# Altium PCB ADC_01_HYB - local.PcbDoc
Units mm, origin at the board's own origin, x right, y up, seen from the top; angles counter-clockwise.
Board outline 100 x 100 mm, 2 copper layers (Top Layer, Bottom Layer), stack 1.57 mm thick; 73 components, 104 nets, 316 pads, 39 vias.
Unrouted connection lines stored in the file: 71.
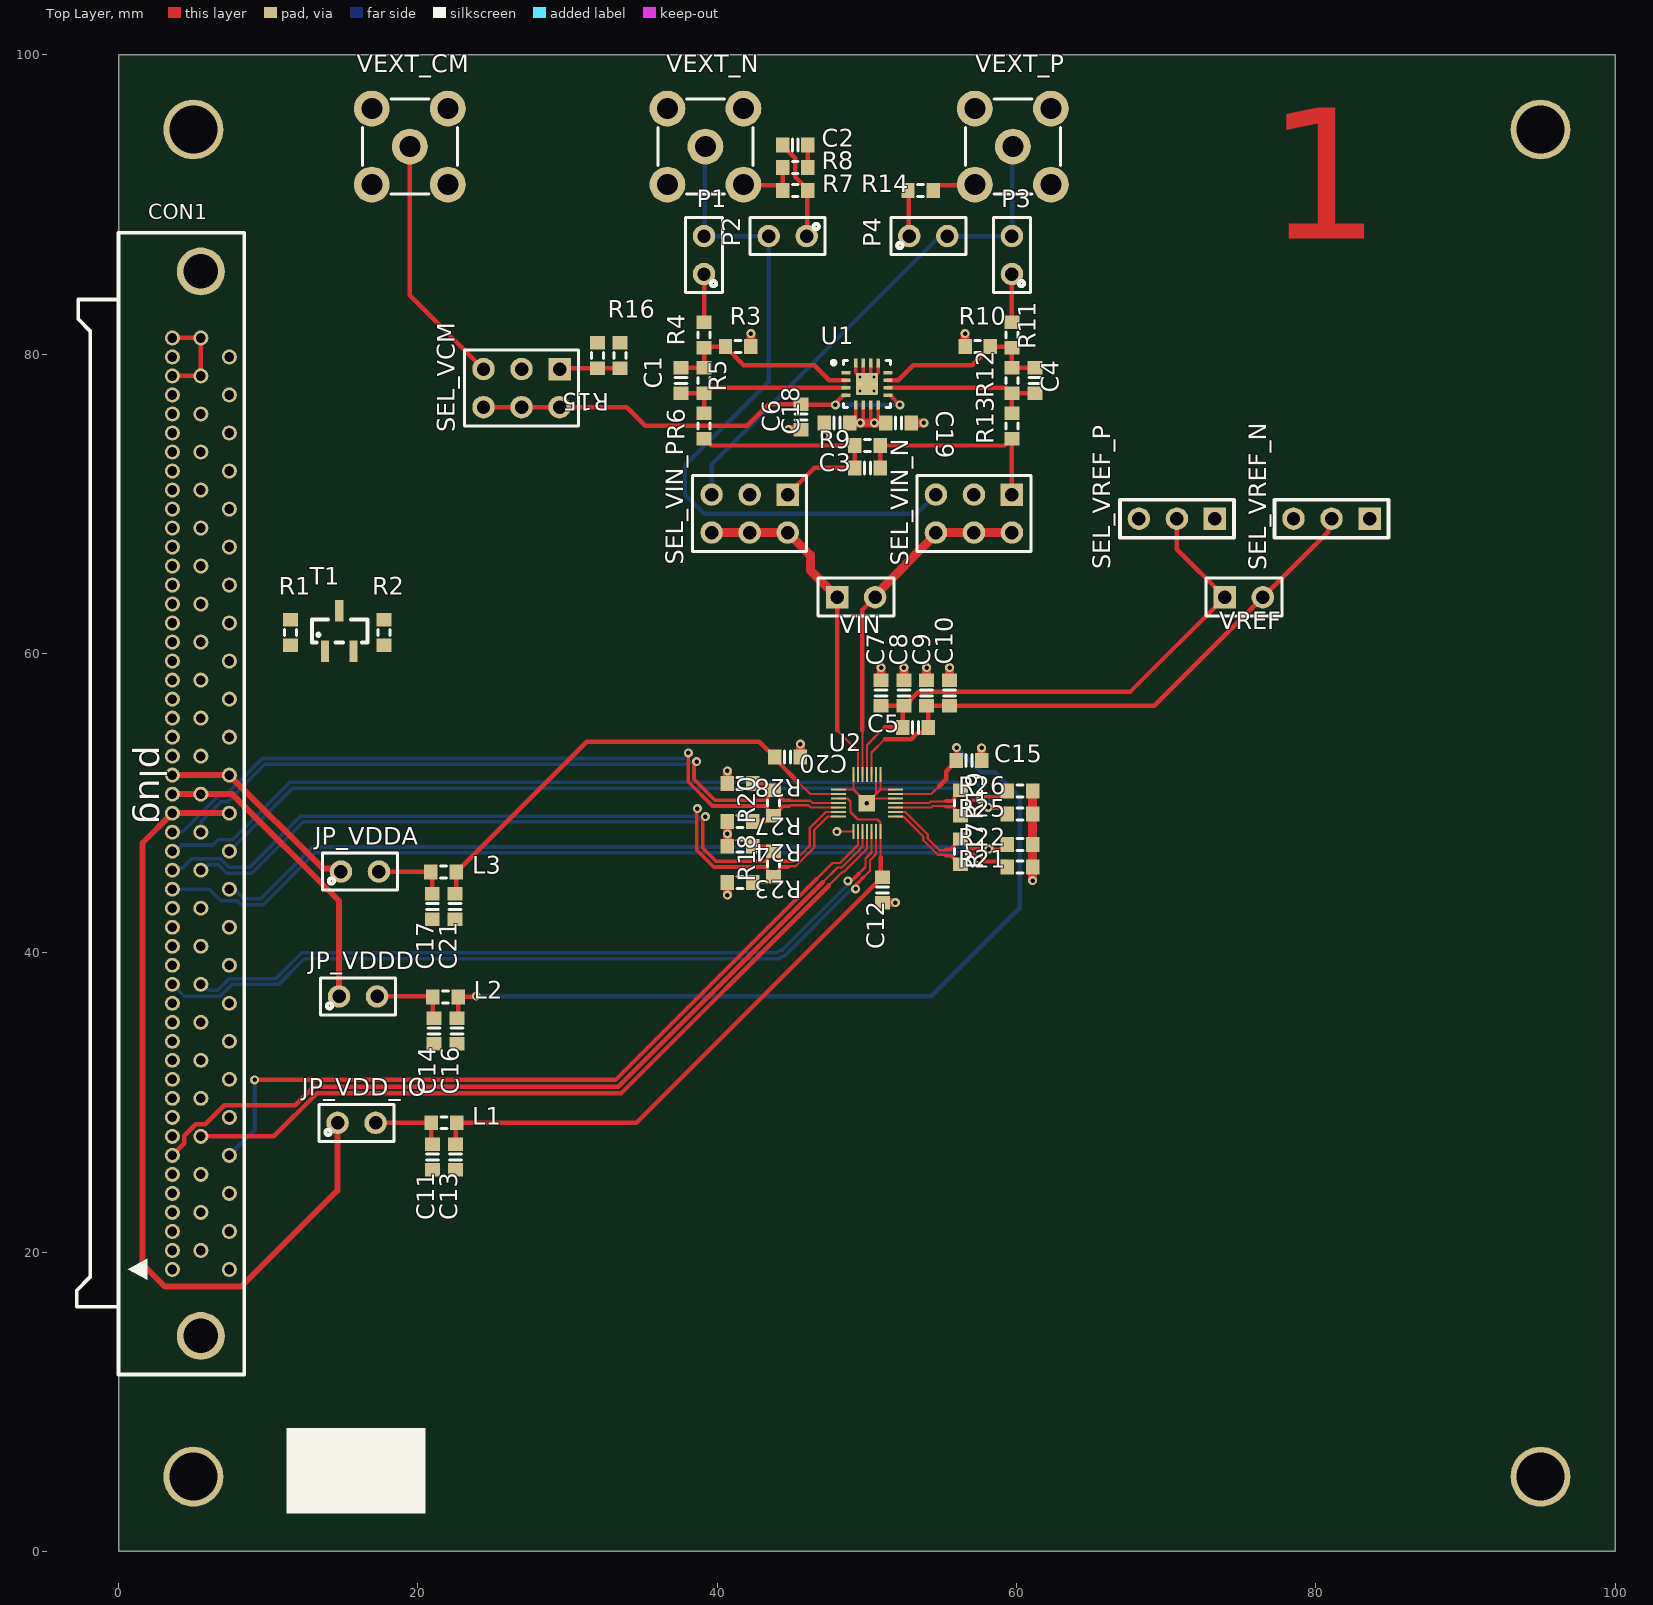
[diagram p0: Top Layer view]
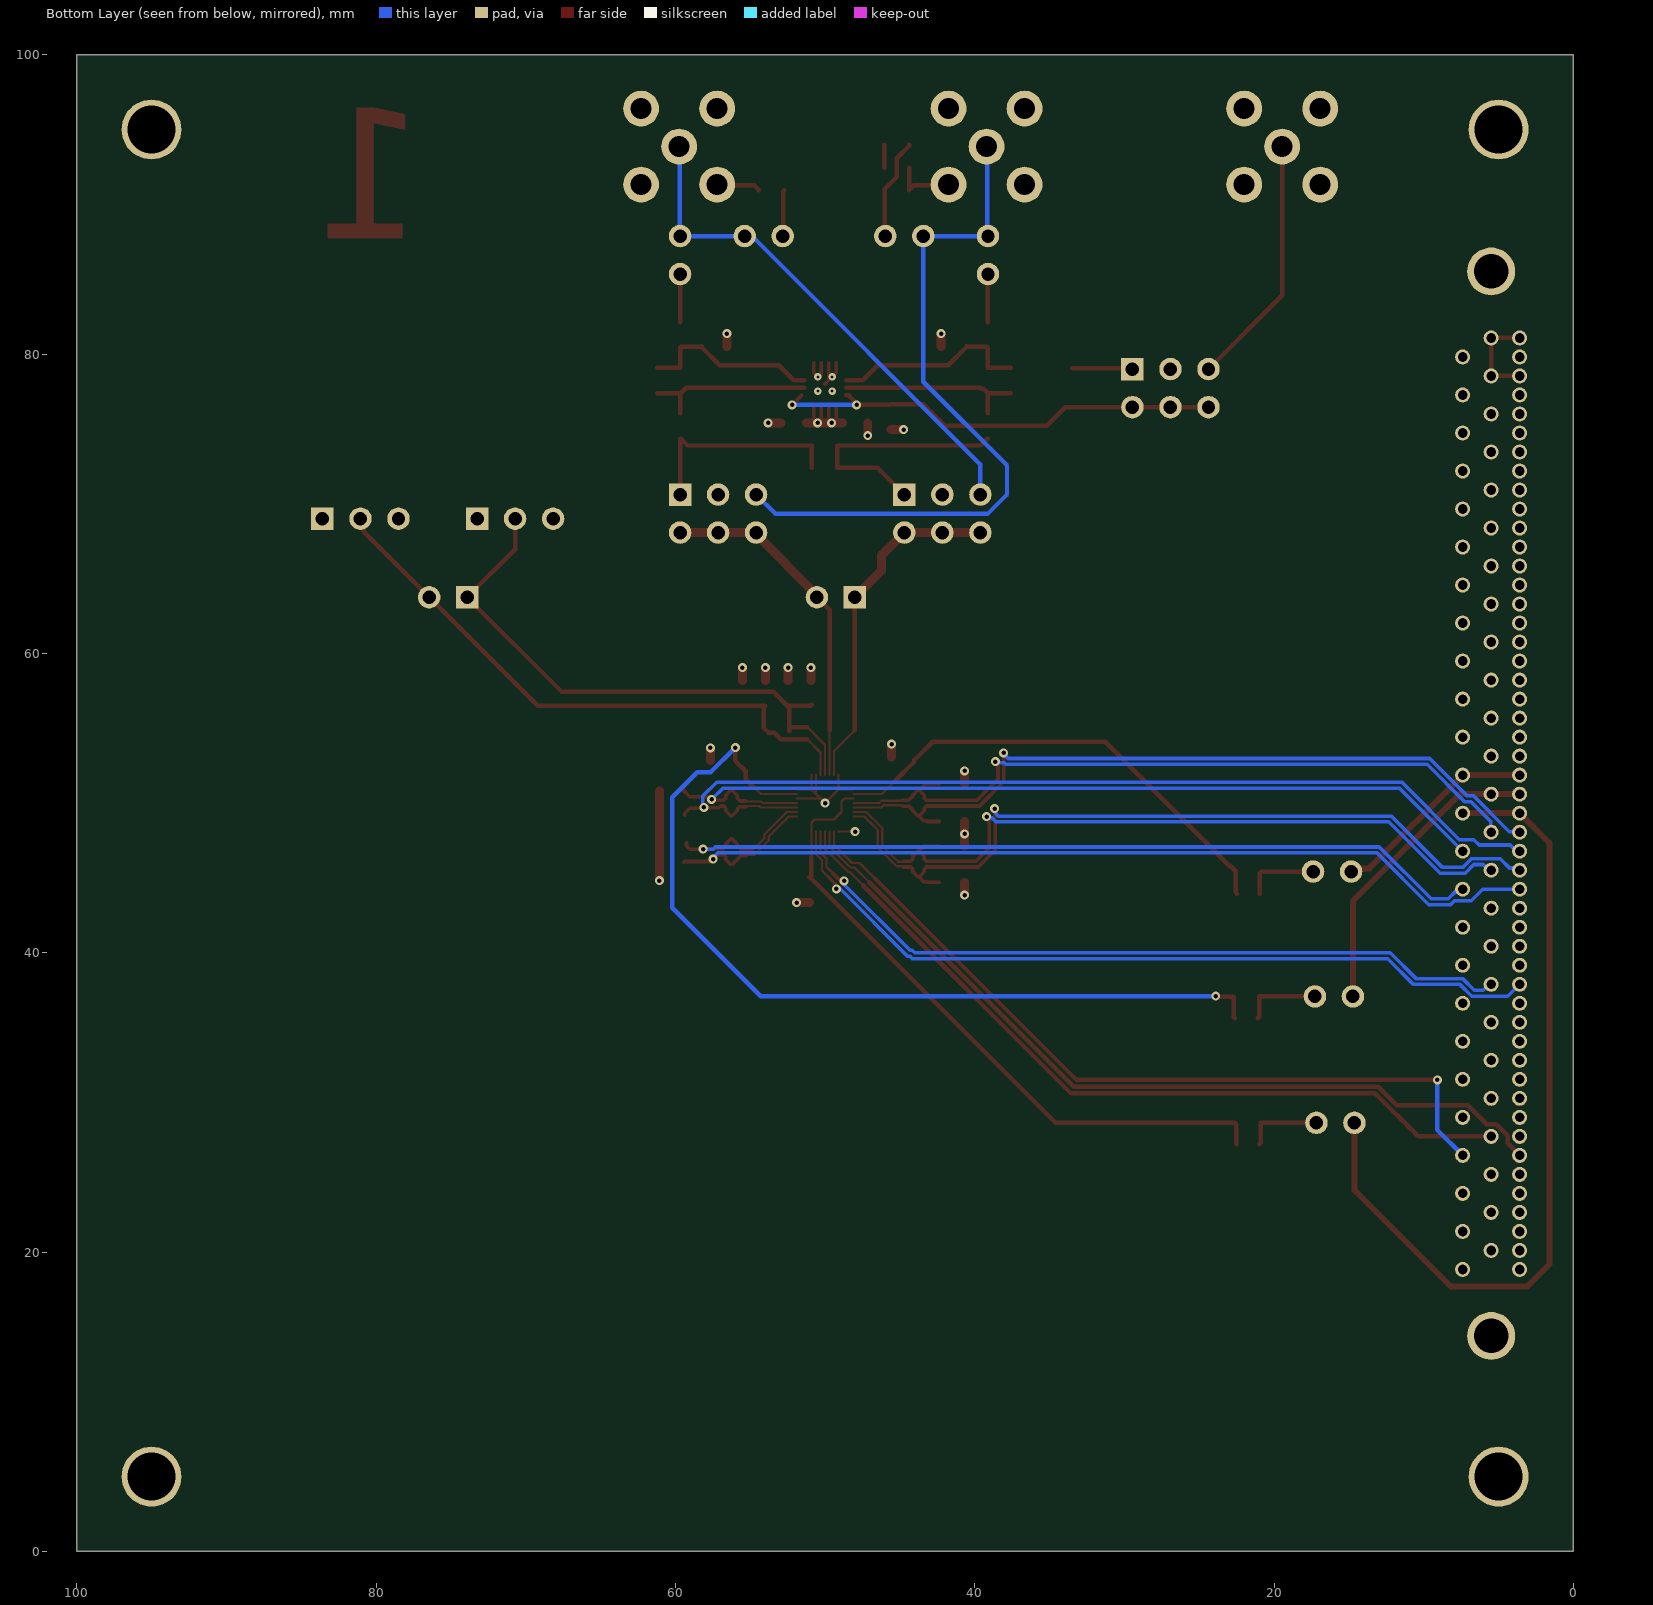
[diagram p1: Bottom Layer view, seen from below]

## Layer stack, top to bottom
Top Solder: solder mask 0.0102, Solder Resist, Dk 3.5
Top Layer: signal copper 0.0356
Dielectric1: core 1.4986, Core-043, Dk 4.3
Bottom Layer: signal copper 0.0356
Bottom Solder: solder mask 0.0102, Solder Resist, Dk 3.5

## Board outline
0,0 0,100 100,100 100,0

## Design rules (kind name [scope] priority, off if disabled: settings)
Clearance [All] p1: gap=0.15 ignorepadtopadclearanceinfootprint=FALSE except(0: Arc-Hole Track-Hole SMDPad-Hole THPad-Hole Via-Hole Fill-Hole Poly-Hole Region-Hole Text-Hole)
ComponentClearance [All] p1: gap=0.05 collisioncheckmode=3 verticalgap=0.254 showdistances=FALSE
DiffPairsRouting [All] p1: maxlimit=0.15 minlimit=0.15 mostfreqgap=0.15 toplayer_minwidth=0.15 toplayer_maxwidth=0.24 toplayer_prefwidth=0.24 bottomlayer_minwidth=0.15 bottomlayer_maxwidth=0.24 bottomlayer_prefwidth=0.24 maxuncoupledlength=12.7
MinimumSolderMaskSliver [All] p1 off: minsoldermaskwidth=0.254
PlaneClearance [All] p1: clearance=0.15
PlaneConnect [All] p1: planeconnectstyle=Direct reliefexpansion=0.508 reliefentries=4 reliefconductorwidth=0.254 reliefairgap=0.254
PolygonConnect PolygonConnect_Via [IsVia] p1: connectstyle=Direct reliefconductorwidth=0.254 reliefentries=4 polygonreliefangle="90 Angle" airgapwidth=0.254
PolygonConnect [All] p2: connectstyle=Relief reliefconductorwidth=0.3 reliefentries=4 polygonreliefangle="90 Angle" airgapwidth=0.2
RoutingVias [All] p1: holewidth=0.711 width=1.27 viastyle="Through Hole" minholewidth=0.3 minwidth=0.6 maxholewidth=0.711 maxwidth=1.27
SilkToBoardRegionClearance [All] p1 off:
SilkToSilkClearance [All] p1 off: silktosilkclearance=0.254
SilkToSolderMaskClearance SilkscreenOverComponentPads [IsPad] p1 off: minsilkscreentomaskgap=0.254 clearancetoexposedcopper=TRUE
SolderMaskExpansion [All] p1: expansion=0.102 istentingtop=FALSE
Width [All] p1: maxlimit=5 minlimit=0.15 preferedwidth=0.2
22 further rules are at their usual default settings.

## Classes and differential pairs
net class LVDS_OUT_P[3..0]: LVDS_OUT_P0 LVDS_OUT_P1 LVDS_OUT_P2 LVDS_OUT_P3
net class LVDS_OUT_N[3..0]: LVDS_OUT_N0 LVDS_OUT_N1 LVDS_OUT_N2 LVDS_OUT_N3
net class LVDS_IN_P[3..0]: LVDS_IN_P0 LVDS_IN_P1 LVDS_IN_P2 LVDS_IN_P3
net class LVDS_IN_N[3..0]: LVDS_IN_N0 LVDS_IN_N1 LVDS_IN_N2 LVDS_IN_N3
component class GPACConnector: CON1
net class AUX_ADC[3..0]: AUX_ADC0 AUX_ADC1 AUX_ADC2 AUX_ADC3
net class DIN[7..0]: DIN0 DIN1 DIN2 DIN3 DIN4 DIN5 DIN6 DIN7
net class DOUT[15..0]: DOUT0 DOUT1 DOUT2 DOUT3 DOUT4 DOUT5 DOUT6 DOUT7 DOUT8 DOUT9 DOUT10 DOUT11 DOUT12 DOUT13 DOUT14 DOUT15
net class FAST_ADC[3..0]: FAST_ADC0 FAST_ADC1 FAST_ADC2 FAST_ADC3
net class FAST_ADC_B[3..0]: FAST_ADC_B0 FAST_ADC_B1 FAST_ADC_B2 FAST_ADC_B3
net class ISRC[11..0]: ISRC0 ISRC1 ISRC2 ISRC3 ISRC4 ISRC5 ISRC6 ISRC7 ISRC8 ISRC9 ISRC10 ISRC11
net class PWR[3..0]: PWR0 PWR1 PWR2 PWR3
net class VSRC[3..0]: VSRC0 VSRC1 VSRC2 VSRC3
differential pair LVDS_OUT3: +LVDS_OUT_P3 -LVDS_OUT_N3
differential pair LVDS_OUT2: +LVDS_OUT_P2 -LVDS_OUT_N2
differential pair LVDS_OUT1: +LVDS_OUT_P1 -LVDS_OUT_N1
differential pair LVDS_OUT0: +LVDS_OUT_P0 -LVDS_OUT_N0
differential pair LVDS_IN3: +LVDS_IN_P3 -LVDS_IN_N3
differential pair LVDS_IN2: +LVDS_IN_P2 -LVDS_IN_N2
differential pair LVDS_IN1: +LVDS_IN_P1 -LVDS_IN_N1
differential pair LVDS_IN0: +LVDS_IN_P0 -LVDS_IN_N0

## Components (designator, comment, footprint, x,y, rotation, side; value= is the part's Value field where it differs from the comment)
C1 "X7R" C0603_imp_N 37.592,78.232 r270 top value=dnm
C2 "X7R" C0603_imp_N 45.212,93.98 r180 top value=220n
C3 "X7R" C0603_imp_N 50.038,72.39 r0 top value=dnm
C4 "X7R" C0603_imp_N 61.214,78.232 r270 top value=dnm
C5 "X7R" C0603_imp_N 53.232,55.064 r0 top value=1u
C6 "X7R" C0603_imp_N 45.6,75.8 r270 top value=220n
C7 "X7R" C0603_imp_N 50.946,57.35 r90 top value=100n
C8 "X7R" C0603_imp_N 52.47,57.35 r90 top value=1u
C9 "X7R" C0603_imp_N 53.994,57.35 r90 top value=100n
C10 "X7R" C0603_imp_N 55.518,57.35 r90 top value=1u
C11 "X7R" C0603_imp_N 20.991,26.358 r270 top value=100n
C12 "X7R" C0603_imp_N 51.054,44.196 r270 top value=100n
C13 "X7R" C0603_imp_N 22.515,26.358 r270 top value=1u
C14 "X7R" C0603_imp_N 21.09,34.76 r270 top value=100n
C15 "X7R" C0603_imp_N 56.808,52.832 r0 top value=100n
C16 "X7R" C0603_imp_N 22.614,34.76 r270 top value=1u
C17 "X7R" C0603_imp_N 20.961,43.103 r270 top value=100n
C18 "X7R" C0603_imp_N 48,75.4 r180 top value=100n
C19 "X7R" C0603_imp_N 52.1,75.4 r0 top value=1u
C20 "X7R" C0603_imp_N 44.704,53.086 r0 top value=100n
C21 "X7R" C0603_imp_N 22.485,43.103 r270 top value=1u
CON1 "-" "KEL 8911-100-178L-F, PLUG" 5.5,14.4 r270 top locked
JP_VDD_IO "-" "CON 1x2 std" 14.633,28.636 r0 top
JP_VDDA "-" "CON 1x2 std" 14.857,45.427 r0 top
JP_VDDD "-" "CON 1x2 std" 14.732,37.084 r0 top
L1 "R" R0603_imp_N 21.753,28.644 r0 top value=Ferrite
L2 "R" R0603_imp_N 21.852,37.046 r0 top value=Ferrite
L3 "R" R0603_imp_N 21.723,45.389 r0 top value=Ferrite
P1 "-" "CON 1x2 std" 39.116,85.344 r90 top
P2 "-" "CON 1x2 std" 45.974,87.884 r180 top
P3 "-" "CON 1x2 std" 59.69,85.344 r90 top
P4 "-" "CON 1x2 std" 52.832,87.884 r0 top
R1 "R" R0603_imp_N 11.5,61.4 r90 top value=20k
R2 "R" R0603_imp_N 17.75,61.4 r90 top value=2k2
R3 "R" R0603_imp_N 41.402,80.518 r180 top value=511R
R4 "R" R0603_imp_N 39.116,81.28 r270 top value=487R
R5 "R" R0603_imp_N 39.116,78.232 r270 top value=499R
R6 "R" R0603_imp_N 39.116,75.184 r90 top value=86R6
R7 "R" R0603_imp_N 45.212,90.932 r180 top value=54R9
R8 "R" R0603_imp_N 45.212,92.456 r180 top value=49R9
R9 "R" R0603_imp_N 50.038,73.89 r180 top value=dnm
R10 "R" R0603_imp_N 57.404,80.518 r0 top value=511R
R11 "R" R0603_imp_N 59.69,81.28 r270 top value=487R
R12 "R" R0603_imp_N 59.69,78.232 r270 top value=499R
R13 "R" R0603_imp_N 59.69,75.184 r90 top value=86R6
R14 "R" R0603_imp_N 53.594,90.932 r0 top value=54R9
R15 "R" R0603_imp_N 32,79.9 r270 top value=1k
R16 "R" R0603_imp_N 33.5,79.9 r90 top value=1k
R17 "R" R0603_imp_N 56.25,46.75 r270 top value=100R
R18 "R" R0603_imp_N 43.75,45.925 r270 top value=100R
R19 "R" R0603_imp_N 56.25,50 r270 top value=100R
R20 "R" R0603_imp_N 43.75,50 r270 top value=100R
R21 "R" R0603_imp_N 60.223,45.72 r0 top value=1k
R22 "R" R0603_imp_N 60.223,47.244 r0 top value=1k
R23 "R" R0603_imp_N 41.529,44.704 r180 top value=1k
R24 "R" R0603_imp_N 41.529,47.117 r180 top value=1k
R25 "R" R0603_imp_N 60.223,49.276 r0 top value=1k
R26 "R" R0603_imp_N 60.223,50.8 r0 top value=1k
R27 "R" R0603_imp_N 41.529,48.768 r180 top value=1k
R28 "R" R0603_imp_N 41.529,51.308 r180 top value=1k
SEL_VCM "Header 3X2" HDR2X3 29.464,78.994 r180 top
SEL_VIN_N "Header 3X2" HDR2X3 59.69,70.612 r180 top
SEL_VIN_P "Header 3X2" HDR2X3 44.704,70.612 r180 top
SEL_VREF_N "-" "HDR 1x3" 81.04,69 r180 top
SEL_VREF_P "-" "HDR 1x3" 70.71,69 r180 top
T1 "FDN357N" SOT23 14.75,61.5 r0 top value=-
U1 "THS4520RGTT" RGT0016A_V 50,78 r0 top
U2 "ADC prototype 0.1" ADC01 50,50 r0 top
VEXT_CM "-" SMASTEHEND 19.46,93.858 r0 top locked
VEXT_N "-" SMASTEHEND 39.21,93.858 r0 top locked
VEXT_P "-" SMASTEHEND 59.75,93.858 r0 top locked
VIN "Header 2" HDR1X2 48.006,63.754 r0 top
VREF "Header 2" HDR1X2 73.914,63.754 r0 top

## Footprints (in the part's own frame and the unit in brackets; to place one, negate y for a bottom-side part, rotate by r counter-clockwise, add the part's x,y. Pads: shape width x height; smd on the part's side, far side on the other; paste and mask are expansions set on the pad)
ADC01 [mm]
  rect 1.1x1.1 smd paste-2 mask+2: 0(0,0)
  rect 0.15x1 smd: 1(-0.9,-1.9) 2(-0.6,-1.9) 3(-0.3,-1.9) 4(0,-1.9) 5(0.3,-1.9) 6(0.6,-1.9) 7(0.9,-1.9) 15(0.9,1.9) 16(0.6,1.9) 17(0.3,1.9) 18(0,1.9) 19(-0.3,1.9) 20(-0.6,1.9) 21(-0.9,1.9)
  rect 1x0.15 smd: 8(1.9,-0.9) 9(1.9,-0.6) 10(1.9,-0.3) 11(1.9,0) 12(1.9,0.3) 13(1.9,0.6) 14(1.9,0.9) 22(-1.9,0.9) 23(-1.9,0.6) 24(-1.9,0.3) 25(-1.9,0) 26(-1.9,-0.3) 27(-1.9,-0.6) 28(-1.9,-0.9)
C0603_imp_N [mm] "Chip Capacitor, Body 1.6x0.8mm, IPC Medium Density"
  rect 0.9x1 smd: 1(-0.85,0) 2(0.85,0)
  silkscreen extent -0.2,-0.4 0.2,0.4, body extent -0.87,-0.48 0.87,0.48, height 0.85
"CON 1x2 std" [mm]
  round 1.5 hole 0.9: 1(0,0) 2(2.54,0)
  silkscreen extent -1.23,-1.23 3.77,1.23
HDR1X2 [mm] "Connector; Header; 2 Position"
  rect 1.5x1.5 hole 0.9: 1(0,0)
  round 1.5 hole 0.9: 2(2.54,0)
  silkscreen extent -1.27,-1.27 3.81,1.27
HDR2X3 [mm] "Connector; Header; 3x2 Position"
  rect 1.5x1.5 hole 0.9: 1(0,0)
  round 1.5 hole 0.9: 2(0,2.54) 3(2.54,0) 4(2.54,2.54) 5(5.08,0) 6(5.08,2.54)
  silkscreen extent -1.27,-1.27 6.35,3.81
"HDR 1x3" [mm] "Steckjumper 3 pins"
  rect 1.5x1.5 hole 0.9: 1(-2.54,0)
  round 1.5 hole 0.9: 2(0,0) 3(2.54,0)
  silkscreen extent -3.81,-1.27 3.81,1.27
"KEL 8911-100-178L-F, PLUG" [mm] "100 pin plug,  board to board, right angle"
  round 1 hole 0.65: 1(-4.445,1.905) 2(-4.445,-1.905) 3(-5.715,0) 4(-5.715,-1.905) 5(-6.985,1.905) 6(-6.985,-1.905) 7(-8.255,0) 8(-8.255,-1.905) 9(-9.525,1.905) 10(-9.525,-1.905) 11(-10.795,0) 12(-10.795,-1.905) 13(-12.065,1.905) 14(-12.065,-1.905) 15(-13.335,0) 16(-13.335,-1.905) 17(-14.605,1.905) 18(-14.605,-1.905) 19(-15.875,0) 20(-15.875,-1.905) 21(-17.145,1.905) 22(-17.145,-1.905) 23(-18.415,0) 24(-18.415,-1.905) 25(-19.685,1.905) 26(-19.685,-1.905) 27(-20.955,0) 28(-20.955,-1.905) 29(-22.225,1.905) 30(-22.225,-1.905) 31(-23.495,0) 32(-23.495,-1.905) 33(-24.765,1.905) 34(-24.765,-1.905) 35(-26.035,0) 36(-26.035,-1.905) 37(-27.305,1.905) 38(-27.305,-1.905) 39(-28.575,0) 40(-28.575,-1.905) 41(-29.845,1.905) 42(-29.845,-1.905) 43(-31.115,0) 44(-31.115,-1.905) 45(-32.385,1.905) 46(-32.385,-1.905) 47(-33.655,0) 48(-33.655,-1.905) 49(-34.925,1.905) 50(-34.925,-1.905) 51(-36.195,0) 52(-36.195,-1.905) 53(-37.465,1.905) 54(-37.465,-1.905) 55(-38.735,0) 56(-38.735,-1.905) 57(-40.005,1.905) 58(-40.005,-1.905) 59(-41.275,0) 60(-41.275,-1.905) 61(-42.545,1.905) 62(-42.545,-1.905) 63(-43.815,0) 64(-43.815,-1.905) 65(-45.085,1.905) 66(-45.085,-1.905) 67(-46.355,0) 68(-46.355,-1.905) 69(-47.625,1.905) 70(-47.625,-1.905) 71(-48.895,0) 72(-48.895,-1.905) 73(-50.165,1.905) 74(-50.165,-1.905) 75(-51.435,0) 76(-51.435,-1.905) 77(-52.705,1.905) 78(-52.705,-1.905) 79(-53.975,0) 80(-53.975,-1.905) 81(-55.245,1.905) 82(-55.245,-1.905) 83(-56.515,0) 84(-56.515,-1.905) 85(-57.785,1.905) 86(-57.785,-1.905) 87(-59.055,0) 88(-59.055,-1.905) 89(-60.325,1.905) 90(-60.325,-1.905) 91(-61.595,0) 92(-61.595,-1.905) 93(-62.865,1.905) 94(-62.865,-1.905) 95(-64.135,0) 96(-64.135,-1.905) 97(-65.405,1.905) 98(-65.405,-1.905) 99(-66.675,0) 100(-66.675,-1.905)
  round 3.2 hole 2.3: L1(0,0) L2(-71.12,0)
  silkscreen extent -73.7,-8.29 2.58,2.9
R0603_imp_N [mm] "Chip Resistor, Body 1.6x0.8mm, IPC Medium Density"
  rect 0.9x1 smd: 1(-0.85,0) 2(0.85,0)
  silkscreen extent -0.2,-0.4 0.2,0.4, body extent -0.85,-0.48 0.85,0.48, height 0.6
RGT0016A_V [mm] "QFN, 16-Leads, Body 3x3mm, Pitch 0.5mm, Thermal Pad 1.45x1.45mm"
  rrect42% 0.6x0.24 smd: 1(-1.4,0.75) 2(-1.4,0.25) 3(-1.4,-0.25) 4(-1.4,-0.75) 9(1.4,-0.75) 10(1.4,-0.25) 11(1.4,0.25) 12(1.4,0.75)
  rrect42% 0.24x0.6 smd: 5(-0.75,-1.4) 6(-0.25,-1.4) 7(0.25,-1.4) 8(0.75,-1.4) 13(0.75,1.4) 14(0.25,1.4) 15(-0.25,1.4) 16(-0.75,1.4)
  rrect7% 1.45x1.45 smd paste-0.725: 17(0,0)
  silkscreen extent -2.35,-1.57 1.57,1.58, body extent -1.5,-1.5 1.5,1.5, height 1
SMASTEHEND [mm]
  round 2.4 hole 1.4: 1(0,0) 2(-2.54,-2.54) 3(2.54,-2.54) 4(2.54,2.54) 5(-2.54,2.54)
  silkscreen extent -3.17,-3.17 3.17,3.17
SOT23 [mm] "SOT23"
  rect 0.55x1.45 smd: 1(-0.95,-1.35) 2(0.95,-1.35) 3(0,1.35)
  silkscreen extent -1.83,-0.76 1.88,0.76

## Part data
C1 C2 C3 C4 C5 C6 C7 C8 C9 C10 C11 C12 C13 C14 C15 C16 C17 C18 C19 C20 C21: library part C, "Capacitor", Class=Passive, Comment_1=-, Constraints=6.3V, HelpURL=-, LatestRevisionDate=27-Nov-2007, PackageDescription=-, Publisher="Silab J.S.", Type_1="SMD Chip Capacitor"
CON1: library part "CON KEL 8911, male", "KEL 8911 100 pin board to board connector", Class=Connector, Comment_1=KEL, Constraints=-, HelpURL=http://www.kel.jp/english/product/Half_8900/8900.pdf, LatestRevisionDate=24-Sep-2008, PackageDescription=-, Publisher="Silab J.S.", Revision="July-2002: Re-released for DXP Platform.", Type_1=8911-100-178L-F
JP_VDD_IO JP_VDDA JP_VDDD P1 P2 P3 P4: library part "JUMPER 1X2S", "Jumper, Solderbridge 1x2", Class=Connector, Comment_1=-, Constraints=-, HelpURL=-, LatestRevisionDate=24-Sep-2008, PackageDescription=-, Publisher="Silab C.H.", Type_1=-
L1 L2 L3 R1 R2 R3 R4 R5 R6 R7 R8 R9 R10 R11 R12 R13 R14 R15 R16 R17 R18 R19 R20 R21 R22 R23 R24 R25 R26 R27 R28: "SMD Chip Resistor", Class=Passive, Comment_1=-, Constraints=1%, HelpURL=-, LatestRevisionDate=27-Nov-2007, PackageDescription=-, Publisher="Silab J.S.", Type_1="SMD Chip Resistor"
SEL_VCM SEL_VIN_N SEL_VIN_P: "Header, 3-Pin, Dual row", LatestRevisionDate=17-Jul-2002, LatestRevisionNote="Re-released for DXP Platform.", Publisher="Altium Limited"
SEL_VREF_N SEL_VREF_P: library part "JUMPER 1X3S", "Jumper, Solderbridge 1x3", Class=Connector, Comment_1=-, Constraints=-, HelpURL=-, LatestRevisionDate=24-Sep-2008, PackageDescription=-, Publisher="Silab C.H.", Type_1=-
T1: library part "T NMOS", "NMOS Transistor SMD", Class="Discrete Silicon", Comment_1=-, Constraints=-, HelpURL=-, LatestRevisionDate=02-Oct-2008, PackageDescription=-, Publisher="Silab J.S.", Type_1=FDN357N
U1: library part CMP-0811-00255-2, "Rail-to-Rail Output Wideband Fully Differential Amplifier, 3 to 5.25 V, -40 to 85 degC, 16-pin QFN (RGT16), Green (RoHS & no Sb/Br)", Manufacturer="Texas Instruments", Offset Voltage Drift (+/-)(Max)(uV/Degrees Celsius=1, 2nd Harmonic(dBc)=115, 3rd Harmonic(dBc)=123, @ MHz=0.1, BW @ Acl(MHz)=620, Code_JEDEC=MO-220, ComponentLink1Description="Manufacturer URL", ComponentLink1URL=http://www.ti.com/, ComponentLink2Description=Datasheet, ComponentLink2URL=http://www.ti.com/general/docs/lit/getliterature.tsp?genericPartNumber=THS4520&fileType=pdf, ComponentLink3Description="Package Specification", ComponentLink3URL=http://www.ti.com/litv/pdf/mpqf119g, DatasheetVersion=SLOS503B, Eco-Plan="Green (RoHS & no Sb/Br)", Io(Typ)(mA)=105, Iq per channel(Max)(mA)=15.3, Mounting Technology="Surface Mount", Number of Channels=1, PackageDescription="16-Pin Plastic Flat Pack, Body 3 x 3 mm, Pitch 0.5 mm", PackageReference=RGT0016A, PackageVersion="4203495/H, 10/2011", PartNumber=THS4520RGTT, Rail-Rail=Out, Settling Time (0.1%)(Typ)(ns)=7, Slew Rate(Typ)(V/us)=570, SubFamily="Fully Differential Amplifier", Vio(Max)(mV)=2.5, Vn at Flatband(Typ)(nV/rtHz)=2, Vs(Max)(V)=5.25, Vs(Min)(V)=3
U2: library part ADC01
VEXT_CM VEXT_N VEXT_P: library part SMA, "MCX RF Coaxial PCB Connector, Thru-Hole, Vertical Mount Socket, Blunt Post Terminal, 50 Ohm Impedance", Class=Connector, Comment_1=-, Constraints=-, HelpURL=http://www.amphenolrf.com/pdf/21.pdf, LatestRevisionDate=24-Sep-2008, PackageDescription=-, Publisher="Silab C.H.", Type_1=-
VIN VREF: "Header, 2-Pin", LatestRevisionDate=17-Jul-2002, LatestRevisionNote="Re-released for DXP Platform.", Publisher="Altium Limited"

## Free pads (board coordinates)
  round 4 hole 3.2: L1(5,5) L2(95,5) L3(95,95) L4(5,95)

## Via types
v1: diameter 0.6, hole 0.3, Top Layer to Bottom Layer, 35 vias
v2: diameter 0.5, hole 0.2, Top Layer to Bottom Layer, 4 vias

## Nets (pads, with @x,y where several pads share a name; then routed paths per layer and width w, separated by ;. In a path a pad name is that pad's centre, name@x,y a point inside that pad or via, vN(x,y) a via of type N, cw(c..) or ccw(c..) an arc to the next point about the centre after c; other vN are vias at no path point)
AUX_ADC0: CON1.77
AUX_ADC1: CON1.78
AUX_ADC2: CON1.79
AUX_ADC3: CON1.80
DIN0: CON1.5
DIN1: CON1.6
DIN2: CON1.7
DIN3: CON1.8
DIN4: CON1.9
DIN5: CON1.10
DIN6: CON1.11
DIN7: CON1.12
DOUT0: CON1.13 U2.2 | length 53.4
  Top Layer w0.15: 46.6,44.9 47.7,46 48.2,46 49.4,47.2 U2.2
  Top Layer w0.3: v1(9.1,31.5) 33.2,31.5 46.6,44.9
  Bottom Layer w0.3: CON1.13 9.1,28.16 v1(9.1,31.5)
DOUT1: CON1.14 U2.3 | length 56
  Top Layer w0.15: 47.05,44.714 48.036,45.7 48.324,45.7 49.7,47.076 U2.3
  Top Layer w0.3: CON1.14 4.4,27.27 4.4,27.766 5.169,28.535 5.804,28.535 7.074,29.805 11.805,29.805 13.05,31.05 33.386,31.05 47.05,44.714
DOUT2: CON1.15 U2.4 | length 53.6
  Top Layer w0.15: 47.449,44.5 48.349,45.4 48.449,45.4 50,46.951 U2.4
  Top Layer w0.3: CON1.15 10.371,27.735 13.236,30.6 33.573,30.6 47.449,44.476 47.449,44.5
DOUT3: CON1.16 R2.1 T1.2
DOUT4: CON1.17
DOUT5: CON1.18
DOUT6: CON1.19
DOUT7: CON1.20
DOUT8: CON1.23
DOUT9: CON1.24
DOUT10: CON1.25
DOUT11: CON1.26
DOUT12: CON1.27
DOUT13: CON1.28
DOUT14: CON1.29
DOUT15: CON1.30
EN_OPA: R1.2 T1.3 U1.12
FAST_ADC0: CON1.82
FAST_ADC1: CON1.84
FAST_ADC2: CON1.86
FAST_ADC3: CON1.88
FAST_ADC_B0: CON1.81
FAST_ADC_B1: CON1.83
FAST_ADC_B2: CON1.85
FAST_ADC_B3: CON1.87
GND: C6.2 C7.2 C8.2 C9.2 C10.2 C11.2 C12.2 C13.2 C14.2 C15.2 C16.2 C17.2 C18.2 C19.2 C20.2 C21.2 CON1.3 CON1.4 CON1.21 CON1.22 CON1.39 CON1.40 CON1.57 CON1.58 CON1.75 CON1.76 CON1.89 CON1.90 CON1.92 CON1.93 CON1.94 R2.2 R7.2 R8.2 R14.2 R16.2 R21.2 R22.2 R23.2 R24.2 R25.2 R26.2 R27.2 R28.2 SEL_VREF_N.1 U1.13 U1.14 U1.15 U1.16 U1.17 U2.0 U2.1 U2.12 U2.14 U2.15 U2.16 U2.21 U2.22 VEXT_CM.2 VEXT_CM.3 VEXT_CM.4 VEXT_CM.5 VEXT_N.2 VEXT_N.3 VEXT_N.4 VEXT_N.5 VEXT_P.2 VEXT_P.3 VEXT_P.4 VEXT_P.5 | length 40.3
  Top Layer w0.15: v1(48,48.1) U2.1 ; U2.22 49.1,50.9 ; U2.21 49.1,50.9 ; U2.16 50.6,50.6 ; U2.15 50.9,50.9 ; U2.12 U2.0@50.3,50.3 ; U2.14 50.9,50.9 ; 49.1,50.9 v1(50,50) U2.0@50.3,50.3 ; U2.0@50.3,50.3 50.6,50.6 ; 50.6,50.6 50.9,50.9
  Top Layer w0.25: U1.16 49.25,78.75 49.4,78.6 v2(49.525,78.475) ; U1.15 49.75,78.25 U1.17 ; U1.14 50.25,78.6 50.375,78.475 v2(50.475,78.475) 50.75,78.75 U1.13
  Top Layer w0.3: VEXT_N.3 41.786,91.282 44.062,91.282 R7.2@44.362,90.982 ; R7.2 R7.2@44.362,90.982 ; R8.2 R7.2@44.362,90.982 ; R14.2 54.444,90.982 54.744,91.282 57.174,91.282 VEXT_P.2
  Top Layer w0.6: v1(40.679,43.854) R23.2 ; R24.2 R27.2 ; R28.2 v1(40.679,52.158) ; v1(44.75,74.95) C6.2 ; C20.2 v1(45.554,53.936) ; v1(47.15,74.55) C18.2 ; C7.2 v1(50.946,59.05) ; C12.2 v1(51.904,43.346) ; C8.2 v1(52.47,59.05) ; C19.2 v1(53.8,75.4) ; C9.2 v1(53.994,59.05) ; C10.2 v1(55.518,59.05) ; C15.2 v1(57.658,53.682) ; R26.2 R25.2 R22.2 R21.2 61.073,44.821 v1(61.075,44.819)
  other v1: 40.679,47.942
  other v2: 49.525,77.525 50.475,77.525
INJ: CON1.91
ISRC0: CON1.59
ISRC1: CON1.60
ISRC2: CON1.61
ISRC3: CON1.62
ISRC4: CON1.63
ISRC5: CON1.64
ISRC6: CON1.65
ISRC7: CON1.66
ISRC8: CON1.67
ISRC9: CON1.68
ISRC10: CON1.69
ISRC11: CON1.70
LVDS_IN_N0: CON1.32 U2.6 | length 53.7
  Top Layer w0.15: 49.511,44.787 49.63,44.906 49.759,45.034 50.2,45.476 50.2,46.176 50.6,46.576 U2.6
  Top Layer w0.24: v1(49.251,44.272) 49.32,44.341 49.32,44.595 49.511,44.787 49.63,44.906 49.759,45.034
  Bottom Layer w0.24: CON1.32 4.39,37.1 6.791,37.1 7.576,37.885 10.685,37.885 12.41,39.61 44.169,39.61 44.329,39.769 44.494,39.769 49.024,44.3 49.223,44.3 v1(49.251,44.272)
LVDS_IN_N1: CON1.34
LVDS_IN_N2: CON1.36
LVDS_IN_N3: CON1.38
LVDS_IN_P0: CON1.31 U2.5 | length 51
  Top Layer w0.15: 49.262,45.096 49.9,45.734 49.9,46.3 50.3,46.7 U2.5
  Top Layer w0.24: v1(48.721,44.802) 48.789,44.871 49.044,44.871 49.265,45.092 49.468,45.296 49.483,45.31
  Bottom Layer w0.24: CON1.31 5.616,37.895 6.021,37.49 6.63,37.49 7.415,38.275 10.523,38.275 12.248,40 44.008,40 44.167,40.159 44.332,40.159 48.748,44.576 48.748,44.774 v1(48.721,44.802)
LVDS_IN_P1: CON1.33
LVDS_IN_P2: CON1.35
LVDS_IN_P3: CON1.37
LVDS_OUT_N0: CON1.42 R17.2 R21.1 U2.8 | length 65.6
  Top Layer w0.15: U2.8 U2.8@52.369,49.1 ; U2.8@52.369,49.1 52.431,49.1 53.759,47.772 53.759,47.516 54.725,46.55 55.235,46.55 55.275,46.51
  Top Layer w0.24: 55.275,46.485 55.615,46.485 56.2,45.9 56.3,45.9 56.63,46.23 56.63,46.414 56.771,46.555 57.158,46.555 57.459,46.253 v1(57.478,46.253) 57.576,46.253 57.729,46.1 59.386,46.1 R21.1@59.436,46.05
  Bottom Layer w0.24: CON1.42 6.055,44.245 6.825,43.475 7.946,43.475 8.211,43.21 9.662,43.21 13.129,46.678 57.168,46.678 57.309,46.537 57.309,46.52 57.478,46.351 v1(57.478,46.253)
LVDS_OUT_N1: CON1.44 R18.2 R23.1 U2.28 | length 54.5
  Top Layer w0.15: 44.746,45.73 44.791,45.775 45.229,45.775 46.481,47.026 46.481,48.206 47.375,49.1 U2.28
  Top Layer w0.24: v1(38.67,49.63) 38.63,49.591 38.63,46.861 39.761,45.73 42.3,45.73 43.229,45.73 43.37,45.589 43.37,45.405 43.7,45.075 R18.2 ; R23.1 43.189,44.704 43.23,44.745 43.42,44.745 R18.2 ; 44.746,45.73 44.271,45.73 44.13,45.589 44.13,45.405 43.8,45.075 R18.2
  Bottom Layer w0.24: CON1.44 3.74,45.66 4.278,45.66 4.902,46.285 6.816,46.285 7.401,45.7 8.746,45.7 12.179,49.132 38.426,49.132 38.601,49.307 38.601,49.561 v1(38.67,49.63)
LVDS_OUT_N2: CON1.46 R19.2 R25.1 U2.10 | length 66.2
  Top Layer w0.15: U2.10 52.493,49.7 54.29,49.7 54.39,49.8 54.675,49.8 54.676,49.799 55.213,49.799 55.262,49.75
  Top Layer w0.24: 55.262,49.75 55.729,49.75 55.87,49.609 55.87,49.48 56.2,49.15 R19.2 56.3,49.15 56.63,49.48 56.63,49.664 56.771,49.805 56.969,49.805 57.094,49.68 58.066,49.68 v1(58.105,49.72) 58.169,49.656 59.043,49.656 59.385,49.314 R25.1@59.385,49.2
  Bottom Layer w0.24: CON1.46 3.801,46.785 4.216,47.2 6.303,47.2 6.658,47.555 7.623,47.555 11.458,51.39 57.241,51.39 58.163,50.468 58.163,49.777 v1(58.105,49.72)
LVDS_OUT_N3: CON1.48 R20.2 R27.1 U2.26 | length 51.5
  Top Layer w0.15: 44.883,49.837 44.901,49.855 46.095,49.855 46.25,49.7 47.675,49.7 U2.26
  Top Layer w0.24: v1(38.075,53.356) 38.06,53.341 38.06,51.431 39.686,49.805 43.229,49.805 43.37,49.664 43.37,49.48 R20.2@43.7,49.15 ; R27.1 43.189,48.768 43.241,48.82 43.42,48.82 R20.2 ; R20.2@43.8,49.15 44.13,49.48 44.13,49.53 44.4,49.8 44.821,49.8
  Bottom Layer w0.24: CON1.48 3.633,48.093 4.293,48.093 6.685,50.485 7.114,50.485 9.609,52.98 37.755,52.98 38.075,53.3 v1(38.075,53.356)
LVDS_OUT_P0: CON1.41 R17.1 R22.1 U2.9 | length 62.4
  Top Layer w0.15: U2.9 52.493,49.4 52.556,49.4 54.059,47.897 54.059,47.64 54.849,46.85 55.6,46.85
  Top Layer w0.24: 55.275,46.9 55.6,46.9 55.87,47.17 55.87,47.27 56.2,47.6 R17.1 56.3,47.6 56.63,47.27 56.63,47.086 56.771,46.945 58.13,46.945 v1(58.15,46.925) 59.043,46.925 59.258,47.14 R22.1@59.258,47.346
  Bottom Layer w0.24: CON1.41 7.523,44.127 7.846,44.127 8.373,43.6 9.5,43.6 12.968,47.068 57.33,47.068 57.473,46.925 v1(58.15,46.925)
LVDS_OUT_P1: CON1.43 R18.1 R24.1 U2.27 | length 51.6
  Top Layer w0.15: 44.751,46.12 44.796,46.075 45.105,46.075 46.181,47.151 46.181,48.33 47.251,49.4 47.507,49.4 U2.27
  Top Layer w0.24: v1(39.2,49.1) 39.2,49.003 39.02,48.823 39.02,47.023 39.923,46.12 42.124,46.12 43.229,46.12 43.37,46.261 43.37,46.445 43.7,46.775 R18.1 ; R24.1 43.189,47.117 43.201,47.105 43.42,47.105 R18.1 ; 44.751,46.12 44.271,46.12 44.13,46.261 44.13,46.445 43.8,46.775 R18.1
  Bottom Layer w0.24: CON1.43 5.641,45.515 6.021,45.895 6.655,45.895 7.24,45.31 8.908,45.31 12.341,48.742 38.588,48.742 38.877,49.031 39.131,49.031 v1(39.2,49.1)
LVDS_OUT_P2: CON1.45 R19.1 R26.1 U2.11 | length 60.9
  Top Layer w0.15: U2.11 52.493,50 54.166,50 54.266,50.1 54.973,50.1 54.975,50.099 55.24,50.099 55.281,50.14
  Top Layer w0.24: 55.281,50.14 55.674,50.14 55.87,50.336 55.87,50.52 56.2,50.85 R19.1 56.3,50.85 56.63,50.52 56.63,50.336 56.771,50.195 57.52,50.195 v1(57.575,50.25) 57.672,50.25 57.842,50.42 59.043,50.42 59.461,50.838 R26.1@59.461,50.876
  Bottom Layer w0.24: CON1.45 11.62,51 56.825,51 v1(57.575,50.25)
LVDS_OUT_P3: CON1.47 R20.1 R28.1 U2.25 | length 49.2
  Top Layer w0.15: 44.843,50.2 44.888,50.155 46.219,50.155 46.374,50 U2.25
  Top Layer w0.24: v1(38.63,52.77) 38.63,52.672 38.45,52.492 38.45,51.593 39.848,50.195 43.229,50.195 43.37,50.336 43.37,50.52 R20.1@43.7,50.85 ; R28.1 43.242,51.308 R20.1@43.7,50.85 ; 44.843,50.2 44.4,50.2 44.13,50.47 44.13,50.52 43.8,50.85 R20.1 R20.1@43.7,50.85
  Bottom Layer w0.24: CON1.47 5.521,48.076 5.521,48.77 6.847,50.095 7.275,50.095 9.77,52.59 37.916,52.59 38.027,52.701 38.561,52.701 v1(38.63,52.77)
NetC1_1: C1.1 R3.2 R4.2 R5.1 U1.2 | length 13.4
  Top Layer w0.3: C1.1 R5.1 R4.2 39.16,80.474 40.508,80.474 R3.2 40.552,80.468 41.772,79.248 46.482,79.248 47.48,78.25 U1.2
NetC1_2: C1.2 R5.2 R6.2 U1.3 | length 12.5
  Top Layer w0.3: C1.2 R5.2 ; R6.2 R5.2 ; U1.3 39.642,77.75 39.574,77.682 39.416,77.682 R5.2
NetC2_1: C2.1 R8.1 | length 1.5
  Top Layer w0.3: R8.1 C2.1
NetC2_2: C2.2 P2.1 R7.1 | length 6.8
  Top Layer w0.3: C2.2 44.362,93.93 45.212,93.08 45.212,91.832 46.062,90.982 R7.1 46.018,90.888 46.018,87.928 P2.1
NetC4_1: C4.1 R10.2 R11.2 R12.1 U1.11 | length 12.2
  Top Layer w0.3: U1.11 52.088,78.25 53.086,79.248 57.034,79.248 58.254,80.468 R10.2 58.298,80.474 59.646,80.474 R11.2 R12.1 C4.1
NetC4_2: C4.2 R12.2 R13.2 U1.10 | length 11.3
  Top Layer w0.3: U1.10 59.272,77.75 59.64,77.382 R12.2 ; R13.2 R12.2 ; C4.2 R12.2
NetC6_1: C6.1 SEL_VCM.2 SEL_VCM.4 SEL_VCM.6 U1.4 U1.9 | length 30.9
  Top Layer w0.25: U1.9@51.575,77.245 51.575,77.225 v1(52.2,76.6)
  Top Layer w0.3: SEL_VCM.6 SEL_VCM.4 SEL_VCM.2 33.946,76.454 35.2,75.2 42,75.2 43.45,76.65 C6.1 45.65,76.6 v1(47.9,76.6) ; v1@47.83,76.65 48.43,77.25 U1.4
  Bottom Layer w0.3: v1(47.9,76.6) v1(52.2,76.6)
NetC11_1: C11.1 JP_VDD_IO.2 L1.1 | length 5.2
  Top Layer w0.3: JP_VDD_IO.2 20.895,28.636 L1.1 20.903,27.296 C11.1
NetC14_1: C14.1 JP_VDDD.2 L2.1 | length 5.2
  Top Layer w0.3: JP_VDDD.2 20.964,37.084 L2.1 21.002,35.698 C14.1
NetC17_1: C17.1 JP_VDDA.2 L3.1 | length 5
  Top Layer w0.3: JP_VDDA.2 20.835,45.427 L3.1 20.961,45.301 C17.1
NetP1_1: P1.1 R4.1 | length 3.2
  Top Layer w0.3: R4.1 P1.1
NetP3_1: P3.1 R11.1 | length 3.2
  Top Layer w0.3: R11.1 P3.1
NetP4_1: P4.1 R14.1 | length 3.1
  Top Layer w0.3: R14.1 52.788,90.888 52.788,87.928 P4.1
NetR15_2: R15.2 R16.1 SEL_VCM.1 | length 4.1
  Top Layer w0.25: SEL_VCM.1 SEL_VCM.1@29.52,79.05
  Top Layer w0.3: SEL_VCM.1@29.52,79.05 R16.1
NetSEL_VCM_5: SEL_VCM.5 VEXT_CM.1 | length 16.9
  Top Layer w0.3: VEXT_CM.1 19.46,83.918 SEL_VCM.5
OPA_OUT_N: C3.2 R9.1 R13.1 SEL_VIN_N.1 | length 14.2
  Top Layer w0.3: C3.2 R9.1 59.196,73.89 59.64,74.334 R13.1 SEL_VIN_N.1
OPA_OUT_P: C3.1 R6.1 R9.2 SEL_VIN_P.1 | length 17
  Top Layer w0.3: R6.1 39.166,74.334 39.61,73.89 R9.2 C3.1 46.482,72.39 SEL_VIN_P.1
PWR0: CON1.49 CON1.50 JP_VDD_IO.1 | length 55.6
  Top Layer w0.4: CON1.49 CON1.50 1.6,47.33 1.6,19.2 3.1,17.7 8.2,17.7 14.633,24.133 JP_VDD_IO.1
PWR1: CON1.51 CON1.52 JP_VDDD.1 | length 20.5
  Top Layer w0.4: CON1.52 CON1.51 7.605,50.595 14.732,43.468 JP_VDDD.1
PWR2: CON1.53 CON1.54 JP_VDDA.1 R15.1 | length 14.1
  Top Layer w0.4: CON1.54 CON1.53 13.633,45.637 14.463,45.637 JP_VDDA.1@14.9,45.2
PWR3: CON1.55 CON1.56
SCL: CON1.98
SDA: CON1.97
VCCA: C18.1 C19.1 CON1.1 CON1.2 CON1.95 CON1.96 CON1.99 CON1.100 R1.1 R3.1 R10.1 T1.1 U1.5 U1.6 U1.7 U1.8 | length 15.3
  Top Layer w0.25: U1.5 49.25,75.475 v1@49.325,75.4 ; U1.6 49.75,75.45 v1@49.8,75.4 ; v1@50.2,75.4 50.25,75.45 U1.7 ; U1.8 50.75,75.45 50.8,75.4
  Top Layer w0.3: CON1.96 CON1.95 CON1.99 CON1.100
  Top Layer w0.6: R3.1 v1(42.252,81.368) ; C18.1 49.325,75.4 49.8,75.4 50.2,75.4 50.8,75.4 C19.1 ; R10.1 v1(56.554,81.368)
  other v1: 49.562,75.4 50.5,75.4
VDD_IO: C12.1 C13.1 L1.2 U2.7 U2.24 | length 44.3
  Top Layer w0.15: U2.24 48.7,50.3 48.9,50.1 48.9,49.4 49.4,48.9 50.7,48.9 50.9,48.7 U2.7 50.9,46.4 50.927,46.373
  Top Layer w0.3: C13.1 22.515,28.556 L1.2 34.602,28.644 C12.1@51.004,45.046 ; 50.927,46.373 50.927,45.123 C12.1@51.004,45.046 ; C12.1 C12.1@51.004,45.046
VDDA: C20.1 C21.1 L3.2 SEL_VREF_P.1 U2.23 | length 32.1
  Top Layer w0.15: 45.312,51.5 46.212,50.6 U2.23
  Top Layer w0.3: C21.1 22.573,44.041 L3.2 22.573,45.439 22.873,45.739 22.923,45.739 31.286,54.102 42.81,54.102 44.03,52.882 44.03,52.832 44.03,52.782 45.312,51.5
VDDD: C15.1 C16.1 L2.2 U2.13 | length 60.6
  Top Layer w0.15: U2.13 54.3,50.6 54.8,51.1
  Top Layer w0.3: C16.1 22.702,35.698 L2.2 23.846,37.046 v1(23.9,37.1) ; 54.8,51.1 55.3,51.6 55.3,52.124 55.958,52.782 C15.1 56,52.874 v1(56,53.7)
  Bottom Layer w0.3: v1(23.9,37.1) 54.3,37.1 60.2,43 60.2,50.4 58.55,52.05 57.65,52.05 v1(56,53.7)
VEXT_N: P1.2 P2.2 SEL_VIN_N.5 VEXT_N.1 | length 47.7
  Bottom Layer w0.3: VEXT_N.1 39.163,93.811 39.163,87.931 P1.2 P2.2 43.434,78.158 37.846,72.57 37.846,70.612 39.116,69.342 53.34,69.342 SEL_VIN_N.5
VEXT_P: P3.2 P4.2 SEL_VIN_P.5 VEXT_P.1 | length 34.4
  Bottom Layer w0.3: SEL_VIN_P.5 39.624,72.624 54.654,87.654 55.142,87.654 P4.2 P3.2 59.72,87.914 59.72,93.828 VEXT_P.1
VIN_N: SEL_VIN_N.2 SEL_VIN_N.4 SEL_VIN_N.6 U2.19 VIN.2 | length 23.3
  Top Layer w0.15: U2.19 49.7,54.864
  Top Layer w0.3: 49.7,54.864 49.7,62.908 VIN.2
  Top Layer w0.6: VIN.2 50.546,63.881 54.61,67.945 SEL_VIN_N.6 SEL_VIN_N.4 SEL_VIN_N.2
VIN_P: SEL_VIN_P.2 SEL_VIN_P.4 SEL_VIN_P.6 U2.20 VIN.1 | length 23.2
  Top Layer w0.15: 48.006,54.864 49.4,53.47 U2.20
  Top Layer w0.3: 48.006,54.864 VIN.1
  Top Layer w0.6: SEL_VIN_P.6 SEL_VIN_P.4 SEL_VIN_P.2 46.216,66.56 46.216,65.544 VIN.1
VREF_N: C5.2 C9.1 C10.1 SEL_VREF_N.2 U2.17 VREF.2 | length 40.1
  Top Layer w0.15: U2.17 50.3,53.373 51.191,54.264
  Top Layer w0.3: 51.191,54.264 52.956,54.264 53.406,54.714 53.782,54.714 54.082,55.014 54.082,56.412 C9.1 C10.1 69.2,56.5 VREF.2 80.821,68.121 80.821,68.781 SEL_VREF_N.2
VREF_P: C5.1 C7.1 C8.1 SEL_VREF_P.2 U2.18 VREF.1 | length 39.3
  Top Layer w0.15: U2.18 50,53.886 51.178,55.064
  Top Layer w0.3: C7.1@50.902,56.566 50.967,56.5 C8.1 ; 51.178,55.064 C5.1 ; C5.1@52.4,54.788 52.4,55.064 52.4,56.43 52.409,56.439 C8.1@52.4,56.439 ; C8.1@52.459,56.439 53.47,57.45 67.61,57.45 VREF.1@73.863,63.703 ; SEL_VREF_P.2 70.71,66.958 73.863,63.805 VREF.1@73.863,63.703 ; VREF.1@73.863,63.627 VREF.1@73.863,63.703 ; VREF.1 VREF.1@73.863,63.703
VSRC0: CON1.71 SEL_VIN_P.3
VSRC1: CON1.72 SEL_VIN_N.3
VSRC2: CON1.73 SEL_VREF_P.3
VSRC3: CON1.74 SEL_VCM.3 SEL_VREF_N.3
pads on no net: CON1.L1 CON1.L2 U1.1

## Other copper
Top Layer:
  text "1" at 76.708,84.836 h15

## Silkscreen, mask and mechanical layers (free items; w line width, h text height)
Top Overlay:
  rectangle: 11.229,2.535 20.5,8.25
Top Solder:
  text "1" at 76.708,84.836 h15
Mechanical 1:
  lines w0.15: 0,1 0,0 ; 0,0 0,100 100,100 100,0 0,0

## Text inside footprints (layer, text, board x,y; h text height)
CON1: Top Overlay "plug" at 0.805,53.845 h3 r270